# Altium PCB PCB2.PcbDoc
Units mil, origin at the board's own origin, x right, y up, seen from the top; angles counter-clockwise.
Board outline 1062.99 x 393.7 mil, 2 copper layers (Top Layer, Bottom Layer), stack 28.7 mil thick; 6 components, 8 nets, 24 pads, 12 vias.
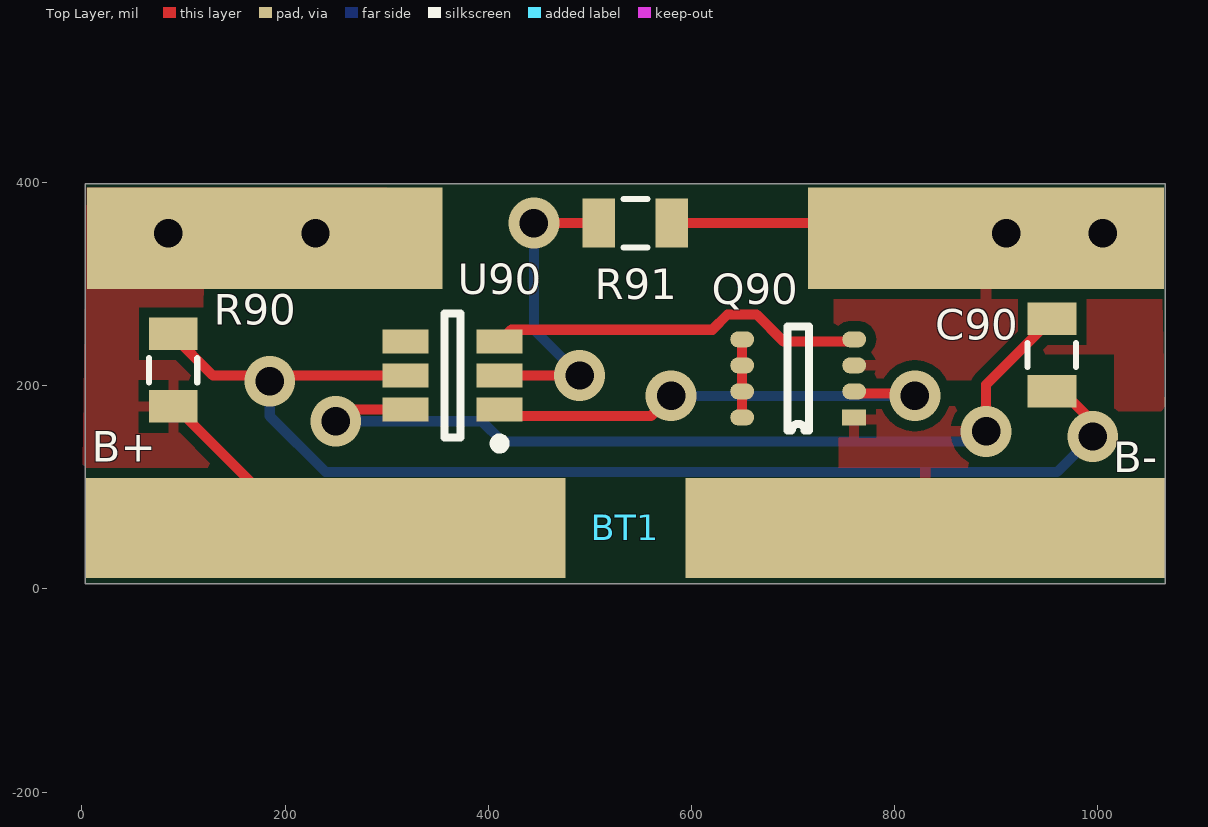
[diagram p0: Top Layer view]
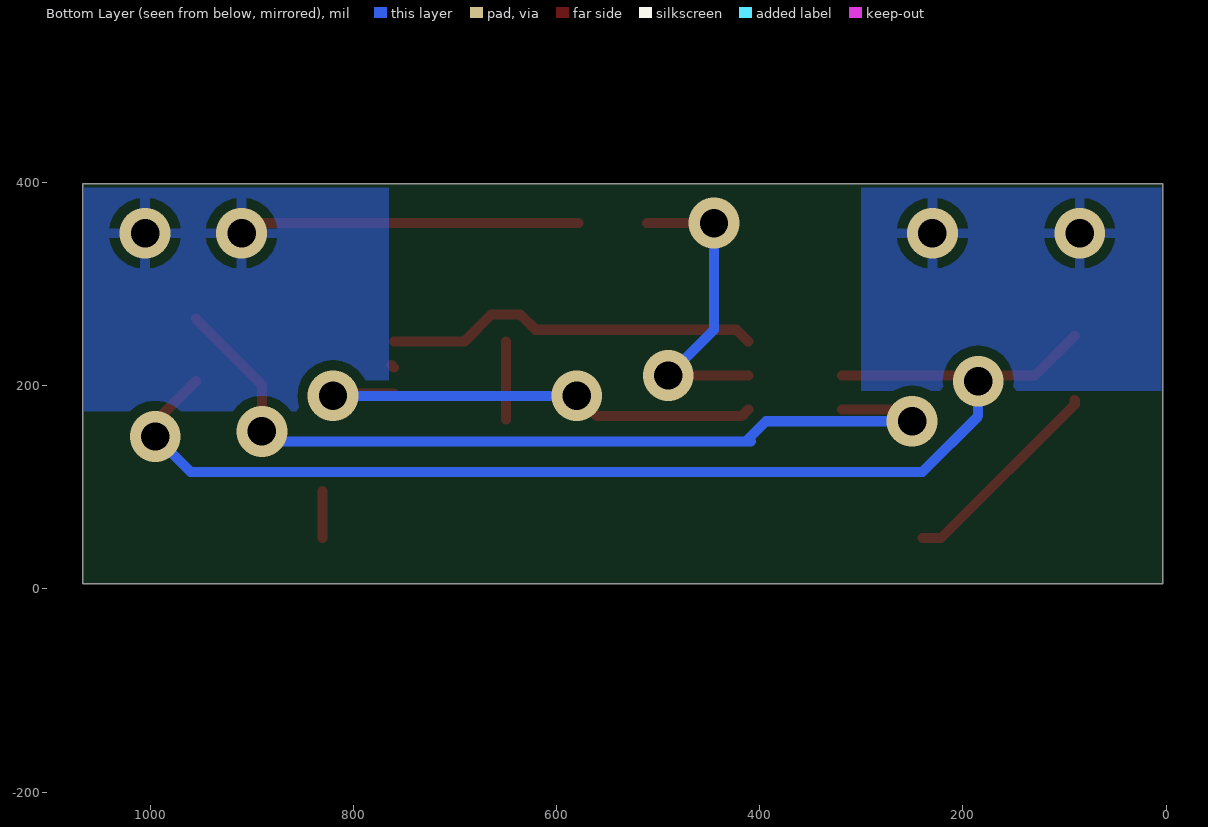
[diagram p1: Bottom Layer view, seen from below]

## Layer stack, top to bottom
Top Solder: solder mask 0.4, Solder Resist, Dk 3.5
Top Layer: signal copper 1.4
Dielectric 1: dielectric 25.9, FR-4, Dk 4.8
Bottom Layer: signal copper 1.4
Bottom Solder: solder mask 0.4, Solder Resist, Dk 3.5

## Board outline
3.15,398.54 3.15,4.84 1066.14,4.84 1066.14,398.54

## Design rules (kind name [scope] priority, off if disabled: settings)
Clearance [All] p1: gap=10
PolygonConnect [All] p1: connectstyle=Relief reliefconductorwidth=10 reliefentries=4 polygonreliefangle="90 Angle" airgapwidth=10
RoutingVias [All] p1: holewidth=28 width=50 viastyle="Through Hole" minholewidth=28 minwidth=50 maxholewidth=28 maxwidth=50
SolderMaskExpansion [All] p1: expansion=4
Width [All] p1: maxlimit=10 minlimit=10 preferedwidth=10
29 further rules are at their usual default settings.

## Components (designator, comment, footprint, x,y, rotation, side; value= is the part's Value field where it differs from the comment)
BT1 "Battery" Battery-Li-ion 535,60 r0 top
C90 "100 nF" 0805 955,230 r90 top
Q90 "ECH8697R-TL-W" SOT-28FL/ECH8 760.24,168.82 r180 top
R90 "470" 0805 90,215 r90 top
R91 "2K" 0805 545,360 r180 top
U90 "S-8261" SOT236-A-PKG 365,210 r180 top

## Footprints (in the part's own frame and the unit in brackets; to place one, negate y for a bottom-side part, rotate by r counter-clockwise, add the part's x,y. Pads: shape width x height; smd on the part's side, far side on the other; paste and mask are expansions set on the pad)
0805 [mil]
  rect 32x48 smd: 1(-35.43,0) 2(36,0)
  silkscreen extent -12,-24 12,24
Battery-Li-ion [mm]
  rect 12x2.5 smd: P+(-7.5,0) P-(7.5,0)
SOT236-A-PKG [mm]
  rect 1.15x0.6 smd: 1(-1.175,0.85) 2(-1.175,0) 3(-1.175,-0.85) 4(1.175,-0.85) 5(1.175,0) 6(1.175,0.85)
  silkscreen extent -1.3,-1.55 0.2,1.82, body extent -0.9,-1.55 0.9,1.55, height 1.3
SOT-28FL/ECH8 [mm]
  rect 0.6x0.4 smd: 1(0,0)
  oval 0.6x0.4 smd: 2(0,-0.65) 3(0,-1.3) 4(0,-1.95) 5(2.8,-1.95) 6(2.8,-1.3) 7(2.8,-0.65) 8(2.8,0)
  silkscreen extent 1.13,-2.28 1.67,0.33

## Part data
C90: library part CAP0805_100nF
R90: library part RES_0805_470
R91: library part RES_0805_2K

## Free pads (board coordinates)
  rect 350x100 smd: 0(890,345) 1(180,345)

## Via types
v1: diameter 50, hole 28, Top Layer to Bottom Layer, 12 vias

## Nets (pads, with @x,y where several pads share a name; then routed paths per layer and width w, separated by ;. In a path a pad name is that pad's centre, name@x,y a point inside that pad or via, vN(x,y) a via of type N, cw(c..) or ccw(c..) an arc to the next point about the centre after c; other vN are vias at no path point)
NetBT1_P-: BT1.P- C90.2 Q90.1 U90.6 | length 903.3
  Top Layer w10: v1@260,170 266.54,176.54 U90.6 ; BT1.P-@830.28,50 BT1.P-@830.28,96.46 ; v1(890,155) 890,201 C90.2
  Bottom Layer w10: v1(250,165) 393.75,165 413.75,145 ; 408.75,145 413.75,145 ; v1(890,155) 880,145 413.75,145
NetC90_1: C90.1 R90.2 U90.5 | length 1197.6
  Top Layer w10: R90.2@90,249 129,210 U90.5 ; C90.1@955,204.41 995,164.41 v1(995,150)
  Bottom Layer w10: v1(185,204.41) 185,170 240,115 960,115 v1(995,150)
NetQ90_2: Q90.2 U90.1 | length 480.5
  Top Layer w10: U90.1 417.8,170 560,170 v1(580,190) ; Q90.2@760.12,192.2 817.8,192.2 v1(820,190)
  Bottom Layer w10: v1(580,190) v1(820,190)
NetQ90_4: Q90.4 U90.3 | length 370.9
  Top Layer w10: U90.3 422.8,255 620.6,255 635.6,270 664.17,270 690.78,243.39 Q90.4@760.12,243.39
NetQ90_5: Q90.5 Q90.6 Q90.7 Q90.8 | length 76.8
  Top Layer w10: Q90.8@649.88,166.61 649.88,192.2 649.88,217.8 Q90.5@649.88,243.39
NetR91_2: R91.2 U90.2 | length 313.4
  Top Layer w10: U90.2 v1(490,210) ; v1(445,360) R91.2@511,360
  Bottom Layer w10: v1(445,360) 445,255 v1(490,210)
V1+: BT1.P+ pad.1 R90.1 | length 208.5
  Top Layer w10: R90.1@90,185.79 90,181.54 221.54,50 BT1.P+@239.72,50
  other v1: 85,350 230,350
VBAT-: pad.0 Q90.3 R91.1 | length 349
  Top Layer w10: R91.1@578.46,360 900,360 v1(910,350) pad.0@907.63,350 ; Q90.3@760.12,217.8 Q90.3@762.83,220.51 ; v1(1005,350) pad.0@1010,345
pads on no net: U90.4

## Polygon pours and split planes (outlines as drawn)
NetBT1_P- on Top Layer "Signal Layer 1- 3V3" (solid, pour order 10): 745,180 945,180 945,75 750,75 745,80
V1+ on Top Layer "Signal Layer 1- 3V3" (solid, pour order 9): 5,395 300,395 300,300 120,300 119,220 120,190 120,140 215,140 215,75 0,75
VBAT- on Top Layer "Signal Layer 1- 3V3" (solid, pour order 8): 765.09,398.54 1061.12,398.54 1066.14,175 1015.97,175 1015.97,230.89 905.58,230.89 905.58,205.48 740,205.48 740,302.01 765.09,302.01
VBAT- on Bottom Layer "Signal Layer 1- 3V3" (solid, pour order 7): 765,395 1065,395 1065,175 765,175
V1+ on Bottom Layer "Signal Layer 1- 3V3" (solid, pour order 6): 5,395 300,395 300,195 5,195

## Silkscreen, mask and mechanical layers (free items; w line width, h text height)
Mechanical 1:
  lines w10: 1066.14,4.84 1066.14,398.54 ; 1066.14,4.84 1066.14,4.84 ; 1066.14,4.84 3.15,4.84 3.15,398.54 1066.14,398.54 ; 1066.14,398.54 1066.14,398.54

## Text inside footprints (layer, text, board x,y; h text height)
BT1: Top Overlay "B-" at 1015,115 h30; Top Overlay "B+" at 10,125 h30